# Altium PCB PCB_ClaySight_MK1.pcbdoc
Units mil, origin at the board's own origin, x right, y up, seen from the top; angles counter-clockwise.
Board outline 5405.31 x 4600 mil, 2 copper layers (Top Layer, Bottom Layer); 38 components, 57 nets, 144 pads, 0 vias.
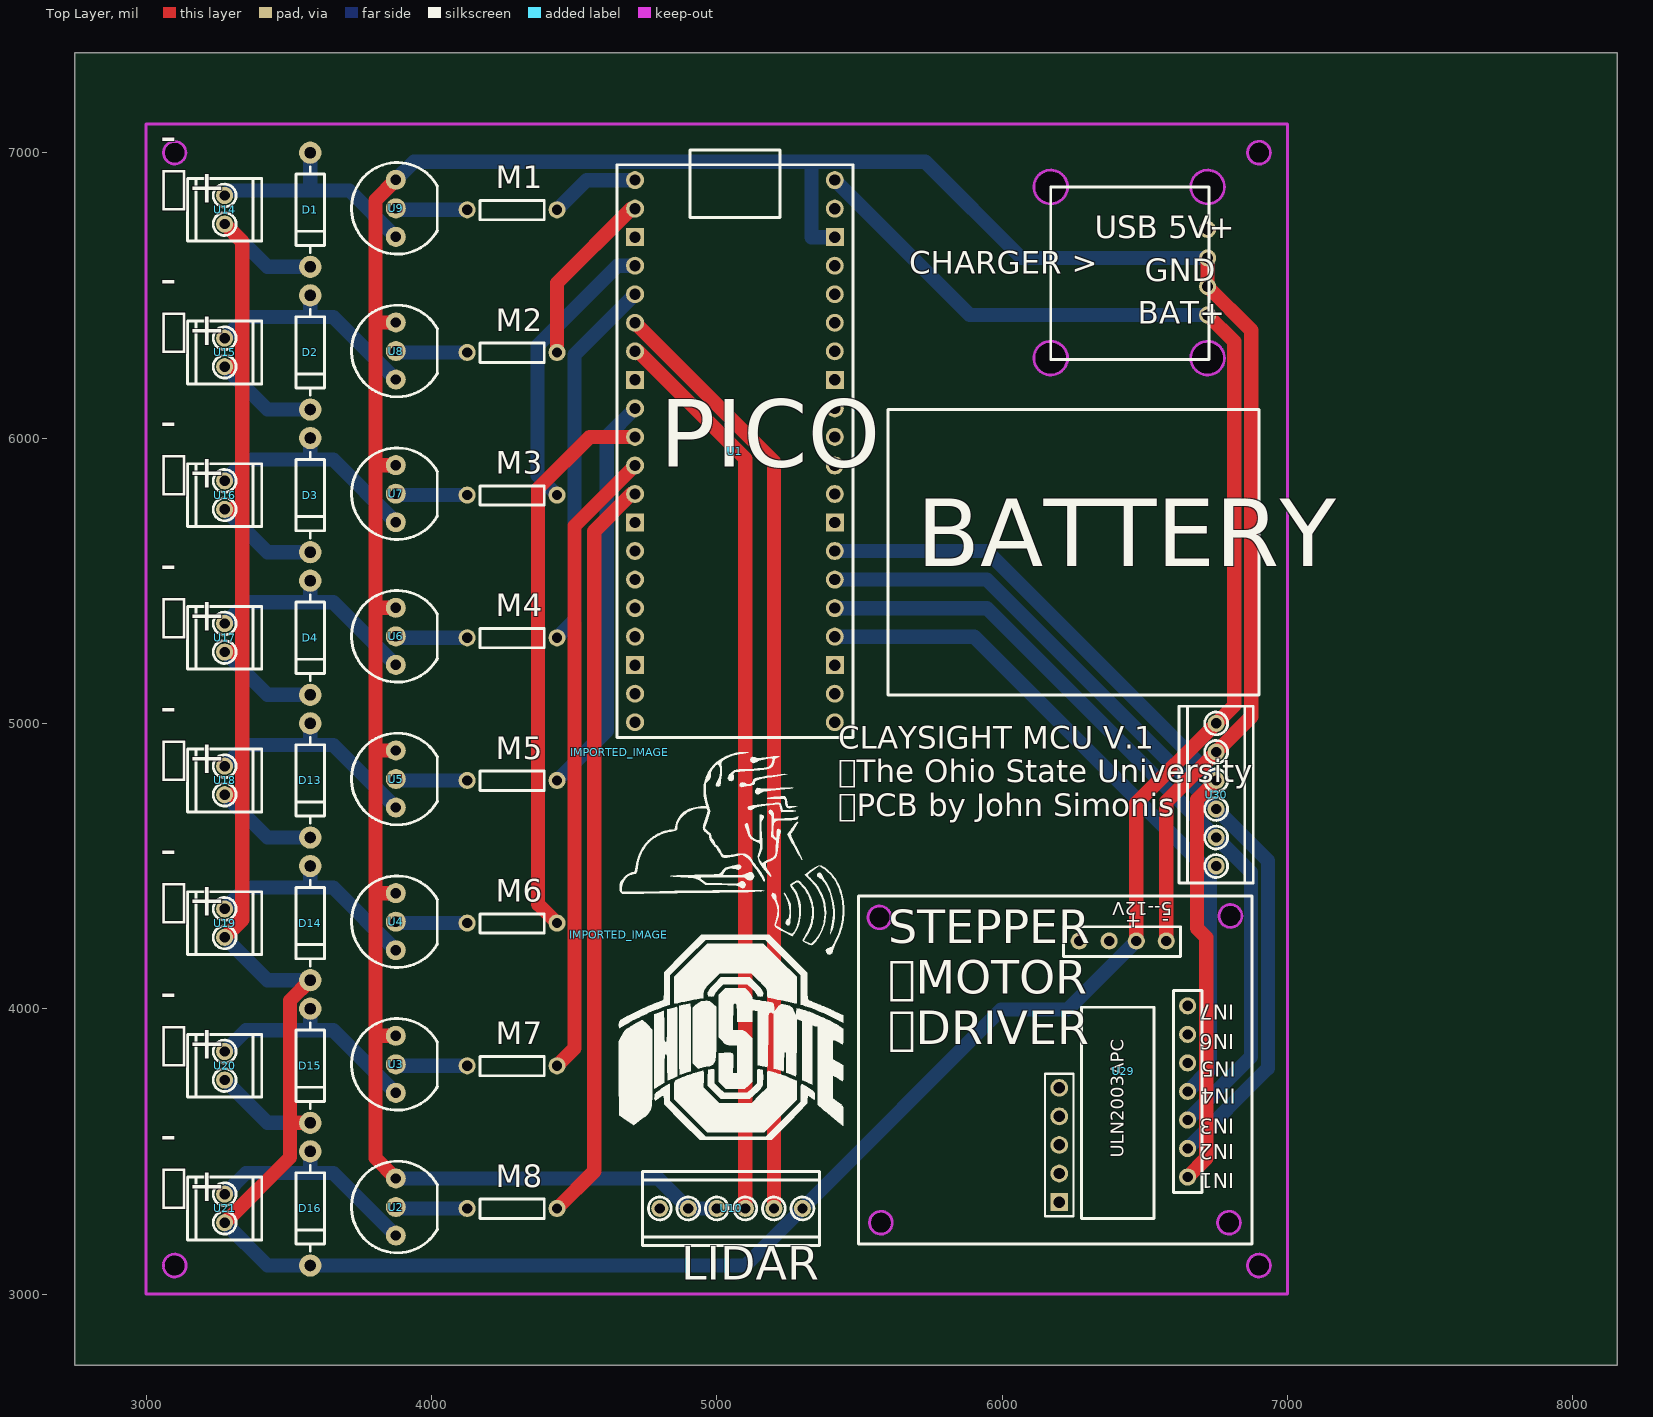
[diagram p0: Top Layer view]
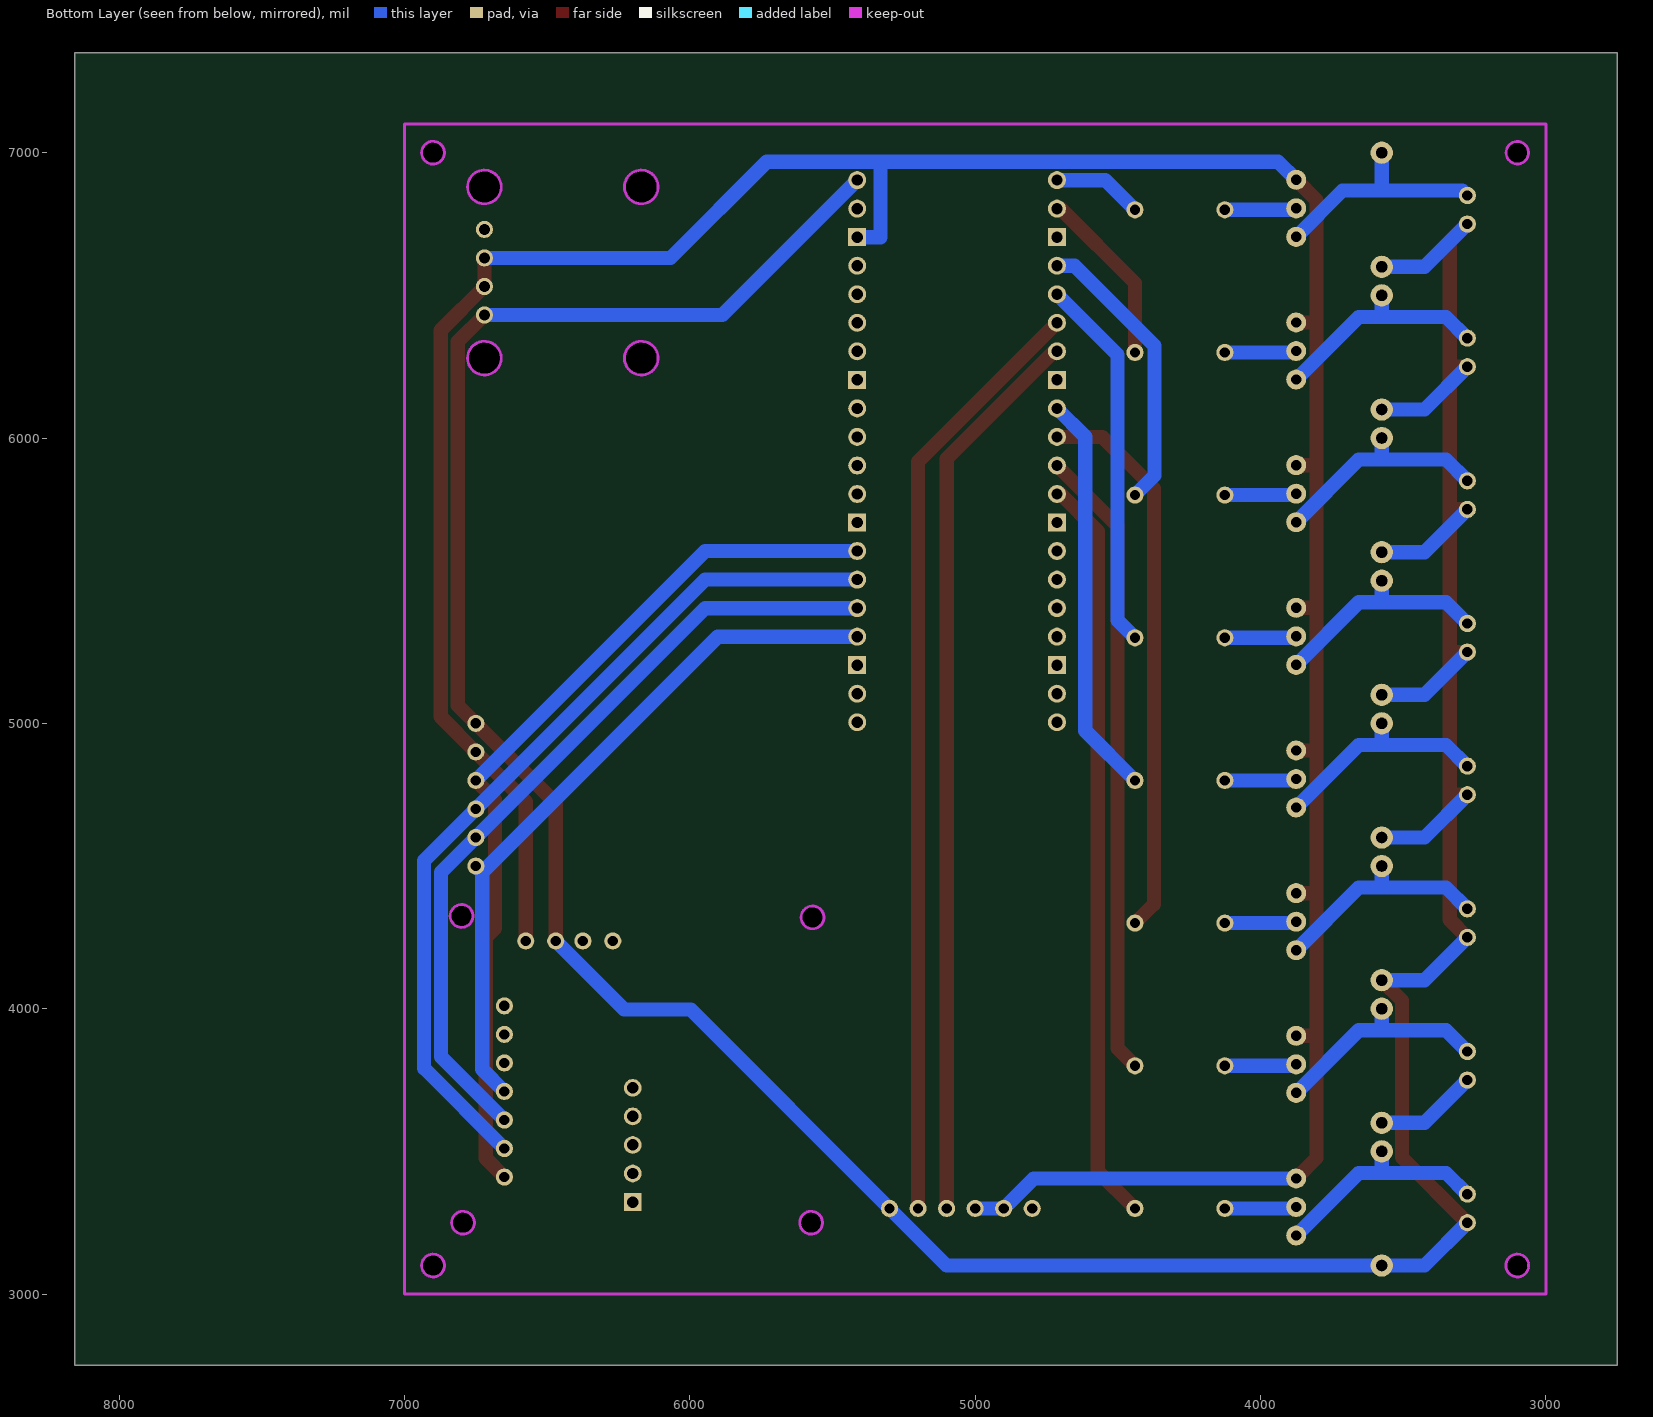
[diagram p1: Bottom Layer view, seen from below]

## Layer stack, top to bottom
Top Layer: signal copper (thickness not stored)
Dielectric: dielectric 12.6, FR-4, Dk 4.8
Bottom Layer: signal copper (thickness not stored)

## Board outline
8155.31,2750 2750,2750 2750,7350 8155.31,7350
cut-out: 6229.06,6880 ccw(c6170,6879.46) 6110.95,6880 ccw(c6170,6880.54)
cut-out: 6779.06,6880 ccw(c6720,6879.46) 6660.95,6880 ccw(c6720,6880.54)
cut-out: 6229.06,6280 ccw(c6170,6279.46) 6110.95,6280 ccw(c6170,6280.54)
cut-out: 6779.06,6280 ccw(c6720,6279.46) 6660.95,6280 ccw(c6720,6280.54)
cut-out: 3139.37,6999.99 ccw(c3100,6999.99) 3060.63,6999.99 ccw(c3100,6999.99)
cut-out: 3140,3100 ccw(c3100,3100) 3060,3100 ccw(c3100,3100)
cut-out: 6939.99,3100 ccw(c6899.99,3100) 6859.99,3100 ccw(c6899.99,3100)
cut-out: 6939.99,6999.99 ccw(c6899.99,6999.99) 6859.99,6999.99 ccw(c6899.99,6999.99)

## Design rules (kind name [scope] priority, off if disabled: settings)
Clearance Default [All] p1: gap=7 ignorepadtopadclearanceinfootprint=FALSE except(0: Region-Region; 6: Track-Track SMDPad-Track THPad-Track Via-Track Fill-Track Region-Track Poly-Track Text-Track Sheet-Track Hole-Track Track-SMDPad SMDPad-SMDPad THPad-SMDPad Via-SMDPad Fill-SMDPad Region-SMDPad Poly-SMDPad Text-SMDPad Sheet-SMDPad Hole-SMDPad Track-THPad SMDPad-THPad THPad-THPad Via-THPad Fill-THPad Region-THPad Poly-THPad Text-THPad Sheet-THPad Hole-THPad Track-Via SMDPad-Via THPad-Via Via-Via Fill-Via Region-Via Poly-Via Text-Via Sheet-Via Hole-Via Track-Fill SMDPad-Fill THPad-Fill Via-Fill Fill-Fill Region-Fill Poly-Fill Text-Fill Sheet-Fill Hole-Fill Track-Region SMDPad-Region THPad-Region Via-Region Fill-Region Poly-Region Text-Region Sheet-Region Hole-Region Track-Poly SMDPad-Poly THPad-Poly Via-Poly Fill-Poly Region-Poly Poly-Poly Text-Poly Sheet-Poly Hole-Poly Track-Text SMDPad-Text THPad-Text Via-Text Fill-Text Region-Text Poly-Text Text-Text Sheet-Text Hole-Text Track-Sheet SMDPad-Sheet THPad-Sheet Via-Sheet Fill-Sheet Region-Sheet Poly-Sheet Text-Sheet Sheet-Sheet Hole-Sheet Track-Hole SMDPad-Hole THPad-Hole Via-Hole Fill-Hole Region-Hole Poly-Hole Text-Hole Sheet-Hole Hole-Hole)
PasteMaskExpansion Common [All] p1:
PlaneConnect Default [All] p1: planeconnectstyle=Relief reliefexpansion=20 reliefentries=4 reliefconductorwidth=0 reliefairgap=1
PolygonConnect Default [All] p1: connectstyle=Relief reliefentries=4 polygonreliefangle="90 Angle" airgapwidth=10
RoutingVias Default [All] p1: viastyle="Through Hole" holewidth=12.008000000000001 minholewidth=12.008000000000001 maxholewidth=2362 width=24.016000000000002 minwidth=24.016000000000002 maxwidth=3938
SolderMaskExpansion Common [All] p1: useseparateexpansions=TRUE expansion=2 expansionbottom=2
Width Default [All] p1: maxlimit=1000 minlimit=50 preferedwidth=50

## Components (designator, comment, footprint, x,y, rotation, side; value= is the part's Value field where it differs from the comment)
D1 "DIODE-1N4001" DIODE-1N4001 3575,6799.99 r270 top
D2 "DIODE-1N4001" DIODE-1N4001 3575,6299.99 r270 top
D3 "DIODE-1N4001" DIODE-1N4001 3575,5799.99 r270 top
D4 "DIODE-1N4001" DIODE-1N4001 3575,5299.99 r270 top
D13 "DIODE-1N4001" DIODE-1N4001 3575,4799.99 r270 top
D14 "DIODE-1N4001" DIODE-1N4001 3575,4299.99 r270 top
D15 "DIODE-1N4001" DIODE-1N4001 3575,3799.99 r270 top
D16 "DIODE-1N4001" DIODE-1N4001 3575,3300 r270 top
IMPORTED_IMAGE "IMPORTED_IMAGE" IMPORTED_IMAGE 4656.14,4259.91 r0 top
IMPORTED_IMAGE "IMPORTED_IMAGE" IMPORTED_IMAGE 4659.24,4899.27 r0 top
M1 "RESISTOR" RESISTOR 4125,6799.99 r0 top
M2 "RESISTOR" RESISTOR 4125,6299.99 r0 top
M3 "RESISTOR" RESISTOR 4125,5799.99 r0 top
M4 "RESISTOR" RESISTOR 4125,5299.99 r0 top
M5 "RESISTOR" RESISTOR 4125,4799.99 r0 top
M6 "RESISTOR" RESISTOR 4125,4299.99 r0 top
M7 "RESISTOR" RESISTOR 4125,3799.99 r0 top
M8 "RESISTOR" RESISTOR 4125,3300 r0 top
U1 "Raspberry Pi Pico W" "RASPBERRY PI PICO/ RASPBERRY PI PICO W" 4650,4949.99 r0 top
U2 "transistorcustom1" TRANSISTORCUSTOM 3875,3300 r180 top
U3 "transistorcustom1" TRANSISTORCUSTOM 3875,3799.99 r180 top
U4 "transistorcustom1" TRANSISTORCUSTOM 3875,4299.99 r180 top
U5 "transistorcustom1" TRANSISTORCUSTOM 3875,4799.99 r180 top
U6 "transistorcustom1" TRANSISTORCUSTOM 3875,5299.99 r180 top
U7 "transistorcustom1" TRANSISTORCUSTOM 3875,5799.99 r180 top
U8 "transistorcustom1" TRANSISTORCUSTOM 3875,6299.99 r180 top
U9 "transistorcustom1" TRANSISTORCUSTOM 3875,6799.99 r180 top
U10 "SCREW-TERMINAL-6P-2.54MM" SCREW-TERMINAL-6P-2.54MM 5299.99,3300 r270 top
U14 "SCREW-TERMINAL-2P-2.54MM" SCREW-TERMINAL-2P-2.54MM 3275,6849.99 r0 top
U15 "SCREW-TERMINAL-2P-2.54MM" SCREW-TERMINAL-2P-2.54MM 3275,6349.99 r0 top
U16 "SCREW-TERMINAL-2P-2.54MM" SCREW-TERMINAL-2P-2.54MM 3275,5849.99 r0 top
U17 "SCREW-TERMINAL-2P-2.54MM" SCREW-TERMINAL-2P-2.54MM 3275,5349.99 r0 top
U18 "SCREW-TERMINAL-2P-2.54MM" SCREW-TERMINAL-2P-2.54MM 3275,4849.99 r0 top
U19 "SCREW-TERMINAL-2P-2.54MM" SCREW-TERMINAL-2P-2.54MM 3275,4349.99 r0 top
U20 "SCREW-TERMINAL-2P-2.54MM" SCREW-TERMINAL-2P-2.54MM 3275,3849.99 r0 top
U21 "SCREW-TERMINAL-2P-2.54MM" SCREW-TERMINAL-2P-2.54MM 3275,3350 r0 top
U29 "ULN2003-STEPPER-MOTOR-DRIVER" ULN2003-STEPPER-MOTOR-DRIVER 6874.99,3175 r180 top
U30 "SCREW-TERMINAL-6P-2.54MM" SCREW-TERMINAL-6P-2.54MM 6749.99,4499.99 r180 top

## Footprints (in the part's own frame and the unit in brackets; to place one, negate y for a bottom-side part, rotate by r counter-clockwise, add the part's x,y. Pads: shape width x height; smd on the part's side, far side on the other; paste and mask are expansions set on the pad)
DIODE-1N4001 [mil]
  round 78 hole 39.36: A(-200,0) C(200,0)
  silkscreen extent -150,-50 150,50
IMPORTED_IMAGE [mil]
  silkscreen extent 0,-720 788,0
"RASPBERRY PI PICO/ RASPBERRY PI PICO W" [mm]
  round 1.6 hole 1 copper offset 0,0: 1(1.61,49.63) 2(1.61,47.09) 4(1.61,42.01) 5(1.61,39.47) 6(1.61,36.93) 7(1.61,34.39) 9(1.61,29.31) 10(1.61,26.77) 11(1.61,24.23) 12(1.61,21.69)
  rect 1.6x1.6 hole 1: 3(1.61,44.55) 8(1.61,31.85) 13(1.61,19.15) 18(1.61,6.45) 23(19.39,6.45) 28(19.39,19.15) 33(19.39,31.85) 38(19.39,44.55)
  round 1.6 hole 1: 14(1.61,16.61) 15(1.61,14.07) 16(1.61,11.53) 17(1.61,8.99) 19(1.61,3.91) 20(1.61,1.37) 21(19.39,1.37) 22(19.39,3.91) 24(19.39,8.99) 25(19.39,11.53) 26(19.39,14.07) 27(19.39,16.61) 29(19.39,21.69) 30(19.39,24.23) 31(19.39,26.77) 32(19.39,29.31) 34(19.39,34.39) 35(19.39,36.93) 36(19.39,39.47) 37(19.39,42.01) 39(19.39,47.09) 40(19.39,49.63)
  silkscreen extent 0,0 21,52.3
RESISTOR [mil]
  round 60 hole 36: 1(0.01,0) 2(314.97,0)
  silkscreen extent 45,-35 270,32
SCREW-TERMINAL-2P-2.54MM [mil]
  round 60 hole 36: 1(0,0) 2(0,-100)
  silkscreen extent -130,-160 130,60
SCREW-TERMINAL-6P-2.54MM [mil]
  round 60 hole 36: 1(0,0) 2(0,-100) 3(0,-200) 4(0,-300) 5(0,-400) 6(0,-500)
  silkscreen extent -130,-560 130,60
TRANSISTORCUSTOM [mil]
  round 70 hole 36: 19(0,-105.01) 20(0,-5.01) 21(0,94.99)
  silkscreen extent -145,-165 155,155
ULN2003-STEPPER-MOTOR-DRIVER [mil]
  round 60 hole 36: 1(225,-235.01) 2(225,-335.01) 3(225,-435.01) 4(225,-535.01) 5(225,-635.01) 6(225,-735.01) 7(225,-835.01) 8(300,-1062.51) 9(405,-1062.51) 10(500,-1062.51) 11(605,-1062.51)
  round 62 hole 40.16: 12(675.01,-547.5) 13(675.01,-447.5) 15(675.01,-247.5) 17(675.01,-347.5)
  rect 62x62 hole 40.16: 16(675.01,-147.5)
  Multi-Layer board cut-out: 40,-75 43.96,-92.36 55.06,-106.28 71.1,-114 88.9,-114 104.94,-106.28 116.04,-92.36 120,-75 120,-75 116.04,-57.65 104.94,-43.73 88.9,-36.01 71.1,-36.01 55.06,-43.73 43.96,-57.65 40,-75
  Multi-Layer board cut-out: 35,-1150 38.96,-1167.36 50.06,-1181.28 66.1,-1189 83.9,-1189 99.94,-1181.28 111.04,-1167.36 115,-1150 115,-1150 111.04,-1132.65 99.94,-1118.73 83.9,-1111.01 66.1,-1111.01 50.06,-1118.73 38.96,-1132.65 35,-1150
  Multi-Layer board cut-out: 1265,-1145 1268.96,-1162.36 1280.06,-1176.28 1296.1,-1184 1313.9,-1184 1329.94,-1176.28 1341.04,-1162.36 1345,-1145 1345,-1145 1341.04,-1127.65 1329.94,-1113.73 1313.9,-1106.01 1296.1,-1106.01 1280.06,-1113.73 1268.96,-1127.65 1265,-1145
  Multi-Layer board cut-out: 1260,-75 1263.96,-92.36 1275.06,-106.28 1291.1,-114 1308.9,-114 1324.94,-106.28 1336.04,-92.36 1340,-75 1340,-75 1336.04,-57.65 1324.94,-43.73 1308.9,-36.01 1291.1,-36.01 1275.06,-43.73 1263.96,-57.65 1260,-75
  Multi-Layer keep-out circle w10: c80,-75 r40
  Multi-Layer keep-out circle w10: c75,-1150 r40
  Multi-Layer keep-out circle w10: c1305,-1145 r40
  Multi-Layer keep-out circle w10: c1300,-75 r40
  silkscreen extent 0,-1220 1378,0

## Free pads (board coordinates)
  round 60 hole 39.37: 1(6719.99,6431.17) 1(6719.99,6531.17) 1(6719.99,6631.17) 1(6719.99,6731.17)

## Nets (pads, with @x,y where several pads share a name; then routed paths per layer and width w, separated by ;. In a path a pad name is that pad's centre, name@x,y a point inside that pad or via, vN(x,y) a via of type N, cw(c..) or ccw(c..) an arc to the next point about the centre after c; other vN are vias at no path point)
N$15664: 
U1_1: M1.2 U1.1 | length 316.5
  Bottom Layer w50: M1.2 4543.89,6903.92 U1.1
U1_2: M2.2 U1.2 | length 625
  Top Layer w50: M2.2 4439.96,6543.74 4700.14,6803.92 U1.2
U1_3: U1.3
U1_4: M3.2 U1.4 | length 1010.3
  Bottom Layer w50: M3.2 4371.07,5868.88 4371.07,6323.09 4651.9,6603.92 U1.4
U1_5: M4.2 U1.5 | length 1317.2
  Bottom Layer w50: M4.2 4501.02,5361.05 4501.02,6291.55 U1.5
U1_6: U1.6 U10.2 | length 3305.5
  Top Layer w50: U1.6 5200,5917.31 U10.2
U1_7: U1.7 U10.3 | length 3169.9
  Top Layer w50: U1.7 4723.36,6303.92 5100,5927.28 U10.3
U1_8: U1.8
U1_9: M5.2 U1.9 | length 1417.2
  Bottom Layer w50: M5.2 4614.3,4974.33 4614.3,6004.83 U1.9
U1_10: M6.2 U1.10 | length 1965.3
  Top Layer w50: M6.2 4373.44,4366.51 4373.44,5822.8 4554.56,6003.92 U1.10
U1_11: M7.2 U1.11 | length 2217.2
  Top Layer w50: M7.2 4501.01,3861.05 4501.01,5691.54 U1.11
U1_12: M8.2 U1.12 | length 2624.9
  Top Layer w50: M8.2 4569.95,3429.99 4569.95,5673.74 4700.13,5803.92 U1.12
U1_13: U1.13
U1_14: U1.14
U1_15: U1.15
U1_16: U1.16
U1_17: U1.17
U1_18: U1.18
U1_19: U1.19
U1_20: U1.20
U1_21: U1.21
U1_22: U1.22
U1_23: U1.23
U1_24: U1.24 U29.4 U30.1 | length 2488.1
  Bottom Layer w50: U1.24 5901.79,5303.93 6727.86,4477.86 ; U29.4 6727.86,3787.87 6727.86,4477.86 ; U30.1 6727.86,4477.86
U1_25: U1.25 U29.3 U30.2 | length 2801.9
  Bottom Layer w50: U1.25 5946.05,5403.93 U30.2 6871.7,4478.28 6871.7,3831.71 U29.3
U1_26: U1.26 U29.2 U30.3 | length 3051.6
  Bottom Layer w50: U1.26 5946.05,5503.93 U30.3 6931.77,4518.21 6931.77,3791.78 U29.2
U1_27: U1.27 U29.1 U30.4 | length 3128.1
  Top Layer w50: U29.1 6715.56,3475.57 6715.56,4249.43 6682.92,4282.07 6682.92,4732.92 U30.4
  Bottom Layer w50: U1.27 5946.05,5603.93 U30.4
U1_28: U1.28
U1_29: U1.29
U1_30: U1.30
U1_31: U1.31
U1_32: U1.32
U1_33: U1.33
U1_34: U1.34
U1_35: U1.35
U1_36: U1.36
U1_37: U1.37
U1_39: U1.39
U2_20: M8.1 U2.20 | length 252.1
  Bottom Layer w50: U2.20 3880,3300 M8.1
U2_21: D16.A U2.21 U21.1 | length 797.3
  Bottom Layer w50: U21.1 3349.54,3424.54 3575,3424.54 ; D16.A 3575,3424.54 ; U2.21 3655.46,3424.54 3575,3424.54
U3_20: M7.1 U3.20 | length 252.1
  Bottom Layer w50: U3.20 3880,3800 M7.1
U3_21: D15.A U3.21 U20.1 | length 797.3
  Bottom Layer w50: U20.1 3349.54,3924.54 3575,3924.54 ; D15.A 3575,3924.54 ; U3.21 3655.46,3924.54 3575,3924.54
U4_20: M6.1 U4.20 | length 252.1
  Bottom Layer w50: U4.20 3880,4299.99 M6.1
U4_21: D14.A U4.21 U19.1 | length 797.3
  Bottom Layer w50: U19.1 3349.54,4424.53 3575,4424.53 ; D14.A 3575,4424.53 ; U4.21 3655.46,4424.53 3575,4424.53
U5_20: M5.1 U5.20 | length 252.1
  Bottom Layer w50: U5.20 3880,4799.99 M5.1
U5_21: D13.A U5.21 U18.1 | length 797.3
  Bottom Layer w50: U18.1 3349.54,4924.53 3575,4924.53 ; D13.A 3575,4924.53 ; U5.21 3655.46,4924.53 3575,4924.53
U6_20: M4.1 U6.20 | length 252.1
  Bottom Layer w50: U6.20 3880,5299.99 M4.1
U6_21: D4.A U6.21 U17.1 | length 797.3
  Bottom Layer w50: U17.1 3349.54,5424.53 3575,5424.53 ; D4.A 3575,5424.53 ; U6.21 3655.46,5424.53 3575,5424.53
U7_20: M3.1 U7.20 | length 252.1
  Bottom Layer w50: U7.20 3880,5799.99 M3.1
U7_21: D3.A U7.21 U16.1 | length 797.3
  Bottom Layer w50: U16.1 3349.54,5924.53 3575,5924.53 ; D3.A 3575,5924.53 ; U7.21 3655.46,5924.53 3575,5924.53
U8_20: M2.1 U8.20 | length 252.1
  Bottom Layer w50: U8.20 3880,6299.99 M2.1
U8_21: D2.A U8.21 U15.1 | length 797.3
  Bottom Layer w50: U15.1 3349.54,6424.53 3575,6424.53 ; D2.A 3575,6424.53 ; U8.21 3655.46,6424.53 3575,6424.53
U9_20: M1.1 U9.20 | length 252.1
  Bottom Layer w50: U9.20 3880,6799.99 M1.1
U9_21: D1.A U9.21 U14.1 | length 807.1
  Bottom Layer w50: U14.1 3292.52,6867.51 3575,6867.51 ; D1.A 3575,6867.51 ; U9.21 3712.48,6867.51 3575,6867.51
U10_6: U10.6
VCC: D1.C D2.C D3.C D4.C D13.C D14.C D15.C D16.C pad.1@6719.99,6431.17 U1.40 U10.1 U14.2 U15.2 U16.2 U17.2 U18.2 U19.2 U20.2 U21.2 U29.9 U30.6 | length 13984.5
  Top Layer w50: U21.2 3504,3479 3504,3600 ; U19.2 3337,4311.99 3337,4749.99 ; U18.2 3337,4749.99 ; U17.2 3337,5249.99 ; U16.2 3337,5749.99 ; U15.2 3337,6249.99 ; U14.2 3337,6687.99 3337,6249.99 ; D15.C 3504,3600 ; D14.C 3504,4028.99 3504,3600 ; U29.9 6469.99,4719.99 U30.6 6813,5063 6813,6338.16 pad.1@6719.99,6431.17 ; 3337,4749.99 3337,5249.99 ; 3337,5249.99 3337,5749.99 ; 3337,5749.99 3337,6249.99
  Bottom Layer w50: U21.2 3425,3100 D16.C 5100,3100 U10.1 5996.99,3996.99 6229.48,3996.99 U29.9 ; U20.2 3425,3600 D15.C ; U19.2 3425,4099.99 D14.C ; U18.2 3425,4599.99 D13.C ; U17.2 3425,5099.99 D4.C ; U16.2 3425,5599.99 D3.C ; U15.2 3425,6099.99 D2.C ; U14.2 3425,6599.99 D1.C ; U1.40 5886.13,6431.17 pad.1@6719.99,6431.17
pads on no net: U1.38 U2.19 U3.19 U4.19 U5.19 U6.19 U7.19 U8.19 U9.19 U10.4 U10.5 U29.5 U29.6 U29.7 U29.8 U29.10 U29.11 U29.12 U29.13 U29.15 U29.16 U29.17 U30.5
copper on no net: | length 11094.7
  Top Layer w50: 3875,3405 3803.47,3476.53 3803.47,3905 ; 3875,3905 3803.47,3905 ; 3875,4404.99 3803.47,4404.99 ; 3875,4904.99 3803.47,4904.99 ; 3875,5404.99 3803.47,5404.99 ; 3875,5904.99 3803.47,5904.99 ; 3875,6404.99 3803.47,6404.99 ; 3875,6904.99 3803.47,6833.46 3803.47,6404.99 ; 6574.99,4237.5 6574.99,4724.99 6749.99,4899.99 6873.25,5023.25 6873.25,6377.91 6719.99,6531.17 6719.99,6631.17 ; 3803.47,3905 3803.47,4404.99 ; 3803.47,4404.99 3803.47,4904.99 ; 3803.47,4904.99 3803.47,5404.99 ; 3803.47,5404.99 3803.47,5904.99 ; 3803.47,5904.99 3803.47,6404.99
  Bottom Layer w50: 3875,3405 4795,3405 4900,3300 5000,3300 ; 3875,6904.99 3938.47,6968.46 5331.86,6968.46 ; 5413.38,6703.92 5331.86,6703.92 5331.86,6968.46 ; 6719.99,6631.17 6067.66,6631.17 5730.37,6968.46 5331.86,6968.46

## Keep-outs
Board Outline Layer:
  lines w10: 3000,3000 5100,3000 7000,3000 7000,7100 3000,7100 3000,5000 3000,3000
Multi-Layer:
  circle w10: c6170,6880 r59.05
  circle w10: c6720,6880 r59.05
  circle w10: c6170,6280 r59.05
  circle w10: c6720,6280 r59.05
  circle w10: c3100,6999.99 r39.37
  circle w10: c3100,3100 r40
  circle w10: c6899.99,3100 r40
  circle w10: c6899.99,6999.99 r40

## Silkscreen, mask and mechanical layers (free items; w line width, h text height)
Top Silkscreen Layer:
  lines w10: 5599.99,5099.99 6899.99,5099.99 6899.99,6099.99 5599.99,6099.99 5599.99,5099.99 ; 6170,6275 6725,6275 6725,6880 6170,6880 6170,6275
  text "- /  +" at 3050,6824.99 h118.11
  text "USB 5V+" at 6324.99,6699.99 h78.74
  text "CHARGER >" at 5674.99,6574.99 h78.74
  text "GND" at 6499.99,6549.99 h78.74
  text "BAT+" at 6474.99,6399.99 h78.74
  text "- /  +" at 3050,6324.99 h118.11
  text "PICO" at 4800,5899.99 h236.22
  text "- /  +" at 3050,5824.99 h118.11
  text "BATTERY" at 5699.99,5549.99 h236.22
  text "- /  +" at 3050,5324.99 h118.11
  text "- /  +" at 3050,4824.99 h118.11
  text "CLAYSIGHT MCU V.1 /  The Ohio State University /  PCB by John Simonis" at 5425,4674.99 h78.74
  text "- /  +" at 3050,4324.99 h118.11
  text "STEPPER /  MOTOR /  DRIVER" at 5599.99,3874.99 h118.11
  text "- /  +" at 3050,3824.99 h118.11
  text "- /  +" at 3050,3325 h118.11
  text "LIDAR" at 4875,3050 h118.11
Mechanical Layer:
  circle w0.2: c6170,6880 r59.05
  circle w0.2: c6720,6880 r59.05
  circle w0.2: c6170,6280 r59.05
  circle w0.2: c6720,6280 r59.05
  circle w0.2: c3100,6999.99 r39.37
  circle w0.2: c3100,3100 r40
  circle w0.2: c6899.99,3100 r40
  circle w0.2: c6899.99,6999.99 r40

## Text inside footprints (layer, text, board x,y; h text height)
U29: Top Silkscreen Layer "5--12V" at 6595.34,4373.6 h46.44 r180; Top Silkscreen Layer "+" at 6489.99,4329.11 h51.45 r180; Top Silkscreen Layer "-" at 6584.99,4329.25 h51.45 r180; Top Silkscreen Layer "IN7" at 6813,4013.97 h52.25 r180; Top Silkscreen Layer "IN6" at 6813,3909.67 h52.25 r180; Top Silkscreen Layer "IN5" at 6818,3813.97 h52.25 r180; Top Silkscreen Layer "IN4" at 6818,3718.97 h52.25 r180; Top Silkscreen Layer "IN3" at 6813,3613.97 h52.25 r180; Top Silkscreen Layer "IN2" at 6813,3524.67 h52.25 r180; Top Silkscreen Layer "IN1" at 6813,3423.97 h52.25 r180; Top Silkscreen Layer "ULN2003APC" at 6425.69,3478.5 h46.44 r90